# EAGLE board RS232_NPN_PNP_4Pin_Conn_Rev (EAGLE 7.7.0)
RS232 Adapter using NPN and PNP Transistors
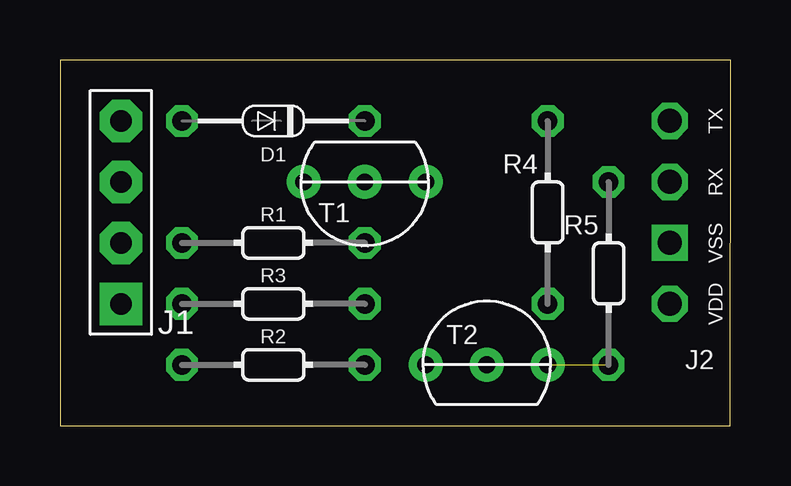
[diagram p0: board, top side]
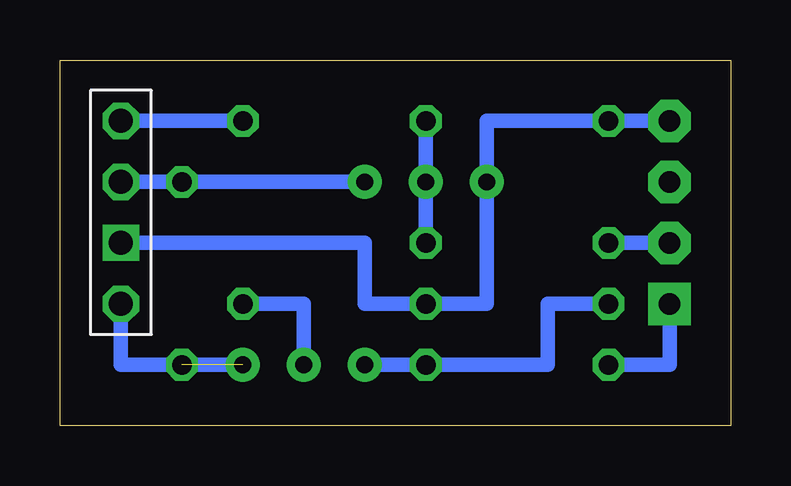
[diagram p1: board, bottom side, seen from below]

Size 27.94 x 15.24 mm. Coordinates in mm from the lower left corner, seen from the top.
Outline: 0,0 27.92,0 27.94,15.24 0,15.24 0,0
Copper layers (1*16): Top 0.035mm / dielectric 1.5mm / Bottom 0.035mm
Design rules "default": minimum track width 10mil, minimum drill 24mil, track to track 8mil, track to pad 8mil, pad to pad 8mil, via to via 8mil, smd to smd 8mil, copper to edge 40mil, drill to drill 8mil, minimum pad ring 10mil, minimum via ring 8mil, stop-mask expansion 4mil, vias tented up to drill 0mil, thermal gap 10mil

## Footprints (pad centres in the part's own frame; a part is rotated, then mirrored left to right if it is on the bottom)
DO34-7 = drill 0.813 octagon: A 3.81,0; C -3.81,0
RS232-4PIN-NEW = drill 0.9 pad 1.778 square: 1 0,-3.81 | drill 0.9 pad 1.778 octagon: 2 0,-1.27; 3 0,1.27; 4 0,3.81
PIC-UART-X = drill 1 octagon: 17 0,-3.81; 18 0,-1.27; 20 0,3.81 | drill 1 square: 19 0,1.27
0202/7 = drill 0.813 octagon: 1 -3.81,0; 2 3.81,0
0202/7-V = drill 0.813 octagon: 1 0,-3.81; 2 0,3.81
TO92-CBE = drill 0.7 pad 1.422: B 0,0; C 0,2.54; E 0,-2.54

## Placement (x,y rotation side)
D1  1N414834-7  [DO34-7]  8.89,12.7 180 top
J1  COMPORT-4PIN-NEW  [RS232-4PIN-NEW]  2.54,8.89 0 top
J2  PIC-UART-X  [PIC-UART-X]  25.4,8.89 180 top
R1  10k  [0202/7]  8.89,7.62 180 top
R2  1k  [0202/7]  8.89,2.54 180 top
R3  4.7k  [0202/7]  8.89,5.08 180 top
R4  10k  [0202/7-V]  20.32,8.89 180 top
R5  1k  [0202/7-V]  22.86,6.35 180 top
T1  BC547  [TO92-CBE]  12.7,10.16 270 top
T2  BC557  [TO92-CBE]  17.78,2.54 90 top

## Library data of the parts
D1 = d
J1 J2 = pinconn
R1-R5 = r
T1 T2 = t

## Nets
+5V: J2.20 R5.2 T2.E
GND: D1.A J1.4 J2.19 R3.1 T1.E
N$1: J2.18 R5.1 T1.C
N$2: D1.C R1.1 T1.B
N$3: J1.2 R1.2
N$4: J2.17 R4.1
N$5: R4.2 T2.B
N$6: R2.1 R3.2 T2.C
N$7: J1.1 R2.2

## Tracks (layer width: path | path; a pad name or v marks a point on that pad's centre or on a via)
+5V  (1 unrouted)
  Bottom 0.61: J2.20 25.4,2.54 T2.E
GND
  Bottom 0.61: J2.19 15.24,7.62 15.24,5.08 R3.1 10.16,5.08 T1.E 10.16,12.7 D1.A J1.4
N$1
  Bottom 0.61: T1.C R5.1 J2.18
N$2
  Bottom 0.61: R1.1 D1.C
N$3
  Bottom 0.61: J1.2 R1.2
N$4
  Bottom 0.61: R4.1 J2.17
N$5
  Bottom 0.61: T2.B 17.78,5.08 R4.2
N$6
  Bottom 0.61: R3.2 7.62,5.08 7.62,2.54 T2.C R2.1
N$7
  Bottom 0.61: J1.1 2.54,2.54 R2.2